# EAGLE board PCB FINALE (EAGLE 6.1)
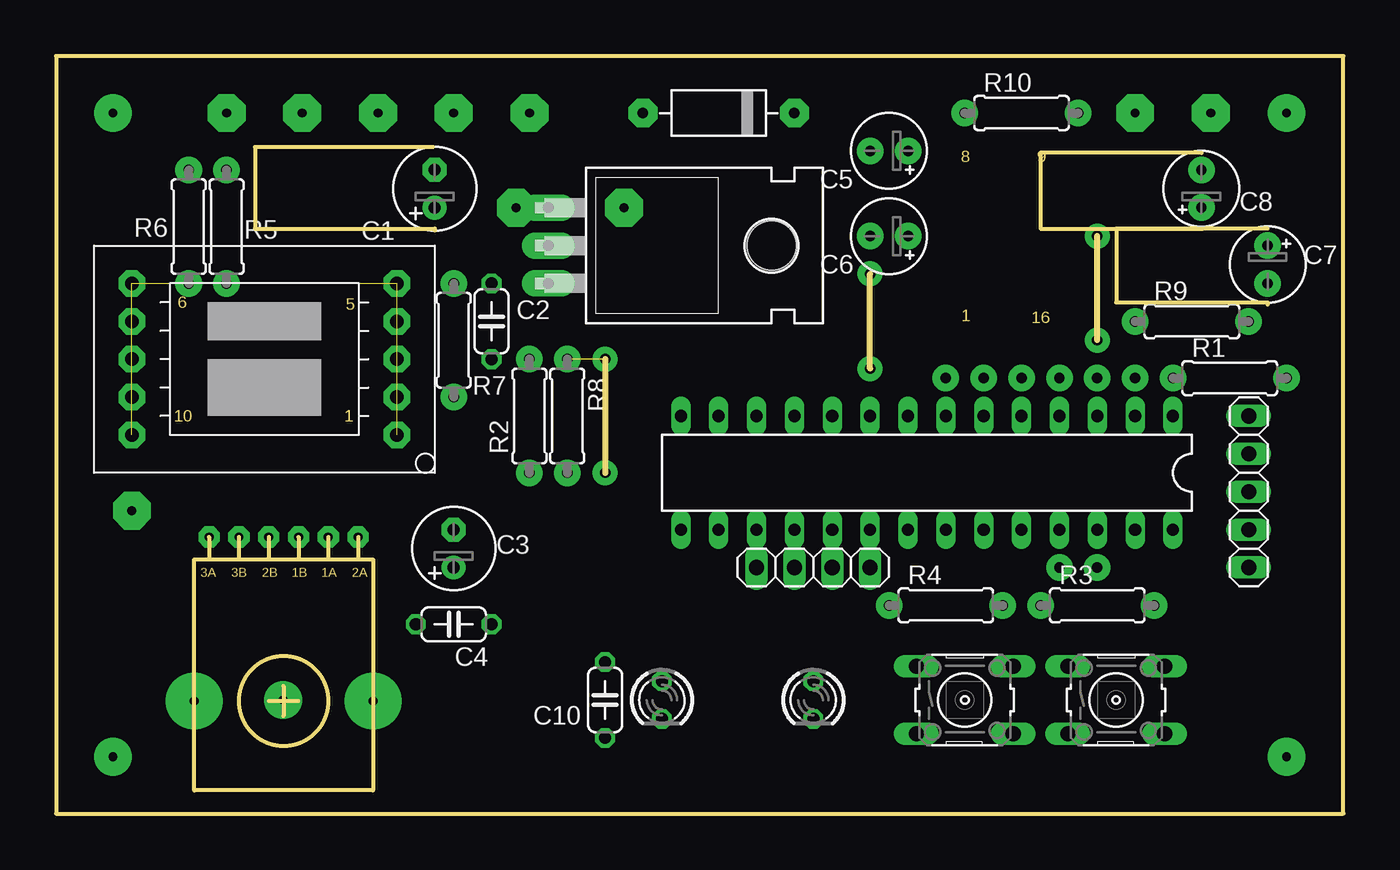
[diagram p0: board, top side]
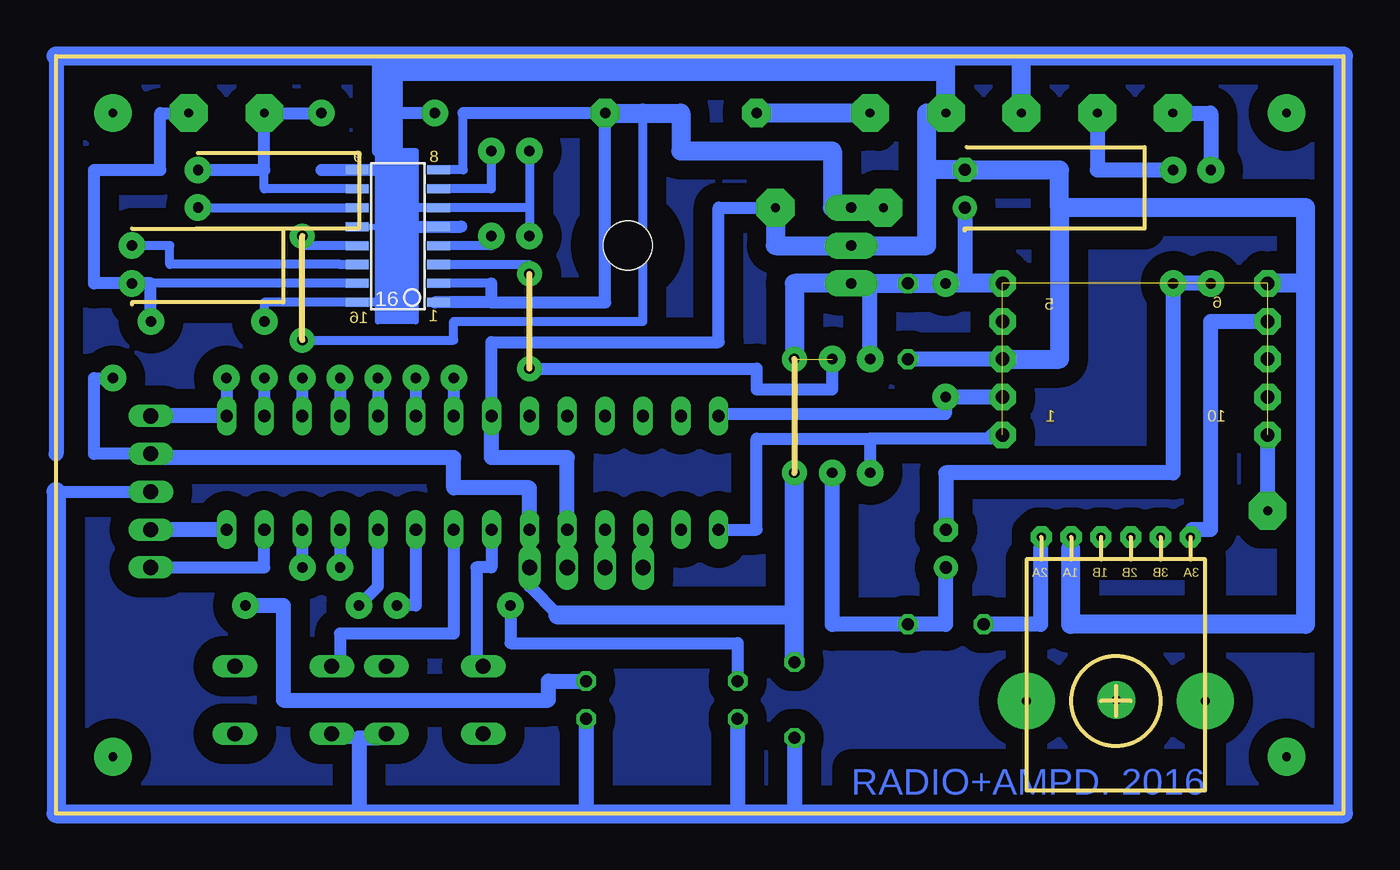
[diagram p1: board, bottom side, seen from below]

Size 86.36 x 50.8 mm. Coordinates in mm from the lower left corner, seen from the top.
Outline: 10.26,17.05 9.26,17.05 9.26,1.55 21.26,1.55 21.26,17.05 20.26,17.05
Outline: 10.26,17.05 12.26,17.05
Outline: 12.26,17.05 14.26,17.05
Outline: 14.26,17.05 16.26,17.05
Outline: 16.26,17.05 18.26,17.05
Outline: 18.26,17.05 20.26,17.05
Outline: 10.26,18.55 10.26,17.05
Outline: 14.26,7.55 16.26,7.55
Outline: 15.26,8.55 15.26,6.55
Outline: 12.26,18.55 12.26,17.05
Outline: 14.26,18.55 14.26,17.05
Outline: 16.26,18.55 16.26,17.05
Outline: 18.26,18.55 18.26,17.05
Outline: 20.26,18.55 20.26,17.05
Outline: 54.61,29.84 54.61,36.2
Outline: 69.85,31.75 69.85,38.73
Outline: 36.83,30.48 36.83,22.86
Outline: 25.27,44.7 13.34,44.7 13.34,39.24 25.4,39.24 25.4,39.12
Outline: 76.83,44.32 66.04,44.32 66.04,39.24 76.96,39.24
Outline: 81.28,39.24 71.12,39.24 71.12,34.29 81.28,34.29 81.28,34.16
Outline: 0,0 86.36,0 86.36,50.8 0,50.8 0,0
Outline: circle at 15.26,7.55 radius 3
Copper layers (1*16): Top 0.035mm / dielectric 1.5mm / Bottom 0.035mm
Design rules: minimum track width 10mil, minimum drill 24mil, track to track 8mil, track to pad 8mil, pad to pad 8mil, via to via 8mil, smd to smd 8mil, copper to edge 40mil, drill to drill 8mil, minimum pad ring 10mil, minimum via ring 8mil, stop-mask expansion 4mil, vias tented up to drill 0mil, thermal gap 10mil

## Footprints (pad centres in the part's own frame; a part is rotated, then mirrored left to right if it is on the bottom)
E2,5-6 = drill 0.813 pad 1.6: + -1.27,0 | drill 0.813 pad 1.6 octagon: - 1.27,0
C050-024X044 = drill 0.813 octagon: 1 -2.54,0; 2 2.54,0
E2,5-5 = drill 0.7 pad 1.778: + -1.27,0; - 1.27,0
SO-16 = smd 0.61 x 1.524: 1 -4.445,-2.794; 2 -3.175,-2.794; 3 -1.905,-2.794; 4 -0.635,-2.794; 5 0.635,-2.794; 6 1.905,-2.794; 7 3.175,-2.794; 8 4.445,-2.794; 9 4.445,2.667; 10 3.175,2.667; 11 1.905,2.667; 12 0.635,2.667; 13 -0.635,2.667; 14 -1.905,2.667; 15 -3.175,2.667; 16 -4.445,2.667
TO220H = drill 0.7 pad 1.778 long: 1 -2.54,-10.16; 2 0,-10.16; 3 2.54,-10.16 | hole 3.302: 0,4.826
TEA5767 = drill 0.9 pad 1.778 octagon: 1 5.08,12.7; 2 5.08,10.16; 3 5.08,7.62; 4 5.08,5.08; 5 5.08,2.54; 6 22.86,2.54; 7 22.86,5.08; 8 22.86,7.62; 9 22.86,10.16; 10 22.86,12.7
D-10 = drill 0.7 pad 1.93 octagon: A 5.08,0; C -5.08,0
DIL28-3 = drill 0.813 long: 1 -16.51,-3.81; 2 -13.97,-3.81; 3 -11.43,-3.81; 4 -8.89,-3.81; 5 -6.35,-3.81; 6 -3.81,-3.81; 7 -1.27,-3.81; 8 1.27,-3.81; 9 3.81,-3.81; 10 6.35,-3.81; 11 8.89,-3.81; 12 11.43,-3.81; 13 13.97,-3.81; 14 16.51,-3.81; 15 16.51,3.81; 16 13.97,3.81; 17 11.43,3.81; 18 8.89,3.81; 19 6.35,3.81; 20 3.81,3.81; 21 1.27,3.81; 22 -1.27,3.81; 23 -3.81,3.81; 24 -6.35,3.81; 25 -8.89,3.81; 26 -11.43,3.81; 27 -13.97,3.81; 28 -16.51,3.81
1X05 = drill 1.016 long: 1 -5.08,0; 2 -2.54,0; 3 0,0; 4 2.54,0; 5 5.08,0
1X04 = drill 1.016 long: 1 -3.81,0; 2 -1.27,0; 3 1.27,0; 4 3.81,0
LED3MM = drill 0.813 octagon: A -1.27,0; K 1.27,0
0207/7 = drill 0.7 pad 1.778: 1 -3.81,0; 2 3.81,0
B3F-10XX = drill 1.016 long: 1 -3.251,2.261; 2 3.251,2.261; 3 -3.251,-2.261; 4 3.251,-2.261

## Placement (x,y rotation side)
C1  10u  [E2,5-6]  25.4,41.91 90 top
C2  100n  [C050-024X044]  29.21,33.02 270 top
C3  200u  [E2,5-6]  26.67,17.78 90 top
C4  1u  [C050-024X044]  26.67,12.7 0 top
C5  1u  [E2,5-5]  55.88,44.45 180 top
C6  1u  [E2,5-5]  55.88,38.73 180 top
C7  1u  [E2,5-5]  81.28,36.83 270 top
C8  1u  [E2,5-5]  76.83,41.91 90 top
C10  100n  [C050-024X044]  36.83,7.62 90 top
E$1  [SO-16]  63.5,38.73 90 bottom
E$3  [TO220H]  43.18,38.1 270 top
E$4  [TEA5767]  27.94,38.1 180 top
E$5  [D-10]  44.45,46.99 180 top
E$6  [DIL28-3]  58.42,22.86 180 top
E$7  [1X05]  80.01,21.59 90 top
E$8  [1X04]  50.8,16.51 0 top
L1  [LED3MM]  50.8,7.62 270 top
L2  [LED3MM]  40.64,7.62 270 top
R1  10K  [0207/7]  78.74,29.21 0 top
R2  10K  [0207/7]  31.75,26.67 90 top
R3  330  [0207/7]  69.85,13.97 0 top
R4  330  [0207/7]  59.69,13.97 0 top
R5  1K  [0207/7]  11.43,39.37 90 top
R6  1K  [0207/7]  8.89,39.37 90 top
R7  10K  [0207/7]  26.67,31.75 270 top
R8  1K  [0207/7]  34.29,26.67 270 top
R9  4k7  [0207/7]  76.2,33.02 0 top
R10  4K7  [0207/7]  64.77,46.99 0 top
T1  [B3F-10XX]  60.96,7.62 0 top
T2  [B3F-10XX]  71.12,7.62 0 top

## Library data of the parts
C1-C8 C10 R1-R10 = rcl
E$1 = texas
E$3 = linear
E$4 = tea5767
E$5 = diode
E$6 = microchip
E$7 E$8 = pinhead
L1 L2 = led
T1 T2 = switch-omron

## Nets
S$6: C6.+
S$7: E$6.28 E$7.2
S$8: E$6.27 E$7.1
S$9: E$4.1 E$6.15 R2.1
S$10: E$4.2 E$6.14 R7.2
S$11: C3.- R5.1 R6.1
S$12: C3.+ C4.2 R8.2
S$13: C4.1
S$14: E$4.7
S$15: E$4.10
S$16: E$5.A
S$17: R9.2
S$20: E$6.7
S$21: E$6.24 R3.1
S$22: L1.A R3.2
S$24: E$6.23 R4.2
S$25: L2.A R4.1
S$26: E$6.21
S$27: C1.+ C2.1 E$3.3 E$4.5 R2.2 R7.1 R8.1
S$28: C7.+
S$29: C8.+
S$31: C5.+
S$33: C1.- C2.2 C10.1 E$3.2 E$4.3 E$4.6 E$6.8 E$6.19 E$7.3 E$8.3 L1.K L2.K R9.1 R10.1
S$34: R6.2
S$48: E$6.22
S$49: E$6.17 E$8.1
S$50: E$6.18 E$8.2
S$51: C10.2 E$6.20 E$7.4 E$8.4 R1.2
S$52: R5.2
S$54: C8.- R10.2
S$55: E$6.1 E$7.5 R1.1
S$56: E$6.2
S$57: E$6.3
S$58: E$6.4
S$59: E$6.5
S$60: E$6.6
S$67: E$6.25
S$68: E$6.26
S$72: E$3.1 E$5.C

## Tracks (layer width: path | path; a pad name or v marks a point on that pad's centre or on a via)
S$1  (via drill 0.6 pad 2.54)
  other vias: 3.81,46.99
S$2  (via drill 0.6 pad 2.54)
  other vias: 82.55,46.99
S$3
  Bottom 0.406: 69.85,38.1 69.85,38.73
  Bottom 0.61: 66.04,38.1 69.85,38.1
S$4  (via drill 0.6 pad 2.54)
  other vias: 3.81,3.81
S$5  (via drill 0.6 pad 2.54)
  other vias: 15.24,7.62
S$6
  Bottom 0.61: 60.96,38.1 57.15,38.1 C6.+
S$7
  Bottom 1.016: E$6.28 E$7.2
S$8
  Bottom 0.813: E$7.1 72.39,16.51 E$6.27
S$9
  Bottom 0.813: E$4.1 23.62,25.4 23.62,25.15 31.75,25.15 | E$6.15 39.37,19.05 39.37,25.15 31.75,25.15 | 31.75,25.15 R2.1
S$10
  Bottom 0.813: R7.2 26.67,26.8 41.91,26.8 E$6.14
  Bottom 1.016: E$4.2 R7.2
S$11
  Bottom 1.016: R6.1 R5.1 11.43,22.86 26.67,22.86 C3.-
S$12
  Bottom 1.016: C3.+ 26.67,12.7 C4.2 34.29,12.7 R8.2
S$13
  Bottom 1.016: 20.32,17.78 20.32,12.7 C4.1
S$14
  Bottom 1.016: E$4.7 8.89,33.02 8.89,19.05 10.16,19.05
S$15  (via drill 0.6 pad 2.54)
  Bottom 1.016: v5.08,20.32 E$4.10
S$16  (via drill 0.6 pad 2.54)
  Bottom 1.27: v31.75,46.99 E$5.A
S$17  (via drill 0.6 pad 2.54)
  Bottom 0.61: 66.04,35.56 80.01,35.56
  Bottom 0.813: v77.47,46.99 79.38,46.99 79.38,43.18 83.82,43.18 83.82,35.56 80.01,35.56 R9.2
S$18  (via drill 0.6 pad 2.54)
  other vias: 82.55,3.81
S$19  (via drill 0.7 pad 1.68)  (1 unrouted)
  other vias: 69.85,38.73 69.85,31.75
S$20  (via drill 0.7 pad 1.78)
  Bottom 0.813: v59.69,29.21 E$6.7
S$21
  Bottom 0.813: R3.1 64.77,15.24 E$6.24
S$22
  Bottom 1.016: R3.2 71.12,13.97 71.12,7.62 53.34,7.62 53.34,8.89 L1.A
S$23
  Bottom 0.813: 26.8,50.04 64.64,50.04
S$24
  Bottom 0.813: E$6.23 62.23,13.97 R4.2
S$25
  Bottom 0.813: R4.1 55.88,11.43 40.64,11.43 L2.A
S$26
  Bottom 0.813: E$6.21 57.15,16.51 58.17,16.51 58.17,10.16
S$27  (via drill 0.7 pad 1.68)  (1 unrouted)
  Bottom 0.406: E$3.3 31.75,35.56
  Bottom 0.813: v54.61,29.84 39.37,29.84 39.37,28.45 34.29,28.45 R8.1
  Bottom 1.016: R2.2 31.75,35.56 | C1.+ 25.4,35.56 E$4.5
  Bottom 1.27: v36.83,30.48 36.83,35.56 E$3.3 | 31.75,35.56 C2.1 R7.1 E$4.5
S$28
  Bottom 0.61: 66.04,36.83 67.31,36.83 78.74,36.83 78.74,38.1 C7.+
S$29
  Bottom 0.61: C8.+ 66.04,40.64
S$30  (via drill 0.7 pad 1.68)  (9 unrouted)
  other vias: 5.08,25.4 5.08,27.94 5.08,30.48 5.08,33.02 5.08,35.56 22.86,25.4 22.86,27.94 22.86,30.48 22.86,33.02 22.86,35.56
S$31
  Bottom 0.61: 60.96,41.91 57.15,41.91 C5.+
S$32  (via drill 0.7 pad 1.68)
  Bottom 0.406: 54.61,36.83 v54.61,36.2
  Bottom 0.61: 60.96,36.83 54.61,36.83
S$33  (via drill 0.6 pad 2.54)
  Bottom 0.406: 64.77,39.37 64.77,34.29 64.77,33.02 62.23,33.02 62.23,39.37 62.23,40.64 62.23,44.45 63.5,44.45 64.01,44.45 64.77,44.45 64.77,43.18 64.77,39.37 | 66.04,39.37 64.77,39.37
  Bottom 0.61: 54.61,44.45 54.61,40.64 | 54.61,40.64 54.61,38.73 | 54.61,40.64 62.23,40.64 | 64.77,34.29 72.39,34.29 R9.1
  Bottom 0.813: E$6.8 57.15,31.62 41.91,31.62 41.91,40.64 v38.1,40.64 | E$6.19 E$8.3 | 67.31,5.08 66.04,5.08 | 86.36,21.59 E$7.3 | 68.58,43.18 64.77,43.18 | 62.23,39.37 59.18,39.37 | 64.77,44.45 64.77,46.99 | 64.77,46.99 64.77,49.53 | 64.77,49.53 64.77,50.8 | R10.1 64.77,46.99 | 26.67,49.53 63.5,49.53 | 63.5,49.53 64.01,49.53 | 64.01,49.53 64.77,49.53 | 64.01,44.45 64.01,49.53 | 63.5,44.45 63.5,49.53
  Bottom 1.016: E$4.3 C2.2 | E$6.19 52.07,23.88 57.15,23.88 E$6.8 | 64.77,5.08 66.04,5.08 66.04,0 | L2.K 40.64,0 | L1.K 50.8,0 | C10.1 36.83,0 | 86.36,50.8 86.36,24.13
  Bottom 1.27: 2.54,35.56 2.54,40.64 19.05,40.64 | 2.54,35.56 2.54,12.7 18.29,12.7 18.29,17.78 | 2.54,35.56 E$4.6 | E$4.3 19.05,30.48 19.05,40.64 | 19.05,40.64 19.05,43.18 C1.- 27.94,43.18 | v38.1,40.64 38.1,38.1 E$3.2 27.94,38.1 27.94,43.18 | 27.94,43.18 27.94,46.99 v26.67,46.99 26.67,49.53 26.67,50.8 | 21.59,50.8 0,50.8 0,0 36.83,0 40.64,0 50.8,0 66.04,0 86.36,0 86.36,21.59 | 21.59,50.8 26.67,50.8 | 26.67,50.8 64.77,50.8 86.36,50.8 | v21.59,46.99 21.59,50.8
S$34  (via drill 0.6 pad 2.54)
  Bottom 1.016: v11.43,46.99 8.89,46.99 R6.2
S$35  (via drill 0.6 pad 1.42)
  other vias: 14.26,18.55
S$36  (via drill 0.6 pad 1.42)
  other vias: 12.26,18.55
S$37  (via drill 0.6 pad 1.42)
  other vias: 10.26,18.55
S$38  (via drill 0.6 pad 1.42)
  other vias: 16.26,18.55
S$39  (via drill 0.6 pad 1.42)
  other vias: 18.26,18.55
S$40  (via drill 0.6 pad 1.42)
  other vias: 20.26,18.55
S$41  (via drill 0.6 pad 3.81)
  other vias: 21.26,7.55
S$42  (via drill 0.6 pad 3.81)
  other vias: 9.26,7.55
S$43  (via drill 0.6 pad 1.42)
  other vias: 12.26,18.55
S$44  (via drill 0.6 pad 1.42)
  other vias: 14.26,18.55
S$45  (via drill 0.6 pad 1.42)
  other vias: 16.26,18.55
S$46  (via drill 0.6 pad 1.42)
  other vias: 18.26,18.55
S$47  (via drill 0.6 pad 1.42)
  other vias: 20.26,18.55
S$48
  Bottom 0.813: E$6.22 59.69,12.06 67.31,12.06 67.31,10.16
S$49
  Bottom 0.406: E$6.17 E$8.1
S$50
  Bottom 0.406: E$6.18 E$8.2
S$51  (via drill 0.7 pad 1.68)
  Bottom 0.406: E$6.20 E$8.4 54.61,15.24
  Bottom 0.813: 54.61,15.24 52.7,13.34 | E$7.4 83.82,24.13 83.82,29.21 R1.2
  Bottom 1.016: E$6.20 54.61,21.84 59.69,21.84 59.69,23.88 79.12,23.88 79.12,24.13 E$7.4
  Bottom 1.27: 52.7,13.34 36.83,13.34 | 36.83,13.34 v36.83,22.86 | C10.2 36.83,13.34
S$52  (via drill 0.6 pad 2.54)
  Bottom 1.016: v16.51,46.99 16.51,43.18 R5.2
S$53
  pour Bottom (isolate 1.27): 0,50.8 0,0 86.36,0 86.36,50.8
S$54  (via drill 0.6 pad 2.54)
  Bottom 0.61: 66.04,41.91 72.39,41.91 72.39,43.18
  Bottom 0.813: R10.2 v72.39,46.99 72.39,43.18 C8.-
S$55
  Bottom 0.813: R1.1 E$6.1
  Bottom 1.016: E$6.1 E$7.5
S$56  (via drill 0.7 pad 1.78)
  Bottom 0.813: v72.39,29.21 E$6.2
S$57  (via drill 0.7 pad 1.78)
  Bottom 0.813: v69.85,29.21 E$6.3
S$58  (via drill 0.7 pad 1.78)
  Bottom 0.813: v67.31,29.21 E$6.4
S$59  (via drill 0.7 pad 1.78)
  Bottom 0.813: v64.77,29.21 E$6.5
S$60  (via drill 0.7 pad 1.78)
  Bottom 0.813: v62.23,29.21 E$6.6
S$67  (via drill 0.7 pad 1.78)
  Bottom 0.813: E$6.25 v67.31,16.51
S$68  (via drill 0.7 pad 1.78)
  Bottom 0.813: E$6.26 v69.85,16.51
S$72  (via drill 0.6 pad 2.54)
  Bottom 0.61: 59.05,46.99 59.05,43.18 60.96,43.18 | 57.15,35.56 60.96,35.56 | 69.85,31.75 59.69,31.75 59.69,33.02 46.99,33.02 46.99,46.99
  Bottom 0.813: 57.15,34.29 57.15,35.56 | 57.15,34.29 60.96,34.29 | 59.05,46.99 E$5.C 49.53,34.29 57.15,34.29
  Bottom 1.27: E$5.C 46.99,46.99 44.45,46.99 44.45,44.45 34.29,44.45 34.29,40.64 E$3.1 v30.86,40.64
(copper drawn outside any net)
  shapes: Bottom area x2

## Text on the board
Bottom: RADIO+AMPD. 2016
Dimension: 8 | 9 | 6 | 5 | 1 | 16 | 10 | 1 | 3A | 3B | 2B | 1B | 1A | 2A
tTest: GND | L | R | VCC | SCL | SDA